# Altium PCB buckboost.PcbDoc
Units mm, origin at the board's own origin, x right, y up, seen from the top; angles counter-clockwise.
Board outline 50.04 x 50.04 mm, 2 copper layers (Top Layer, Bottom Layer); 20 components, 11 nets, 69 pads, 24 vias.
Unrouted connection lines stored in the file: 6.
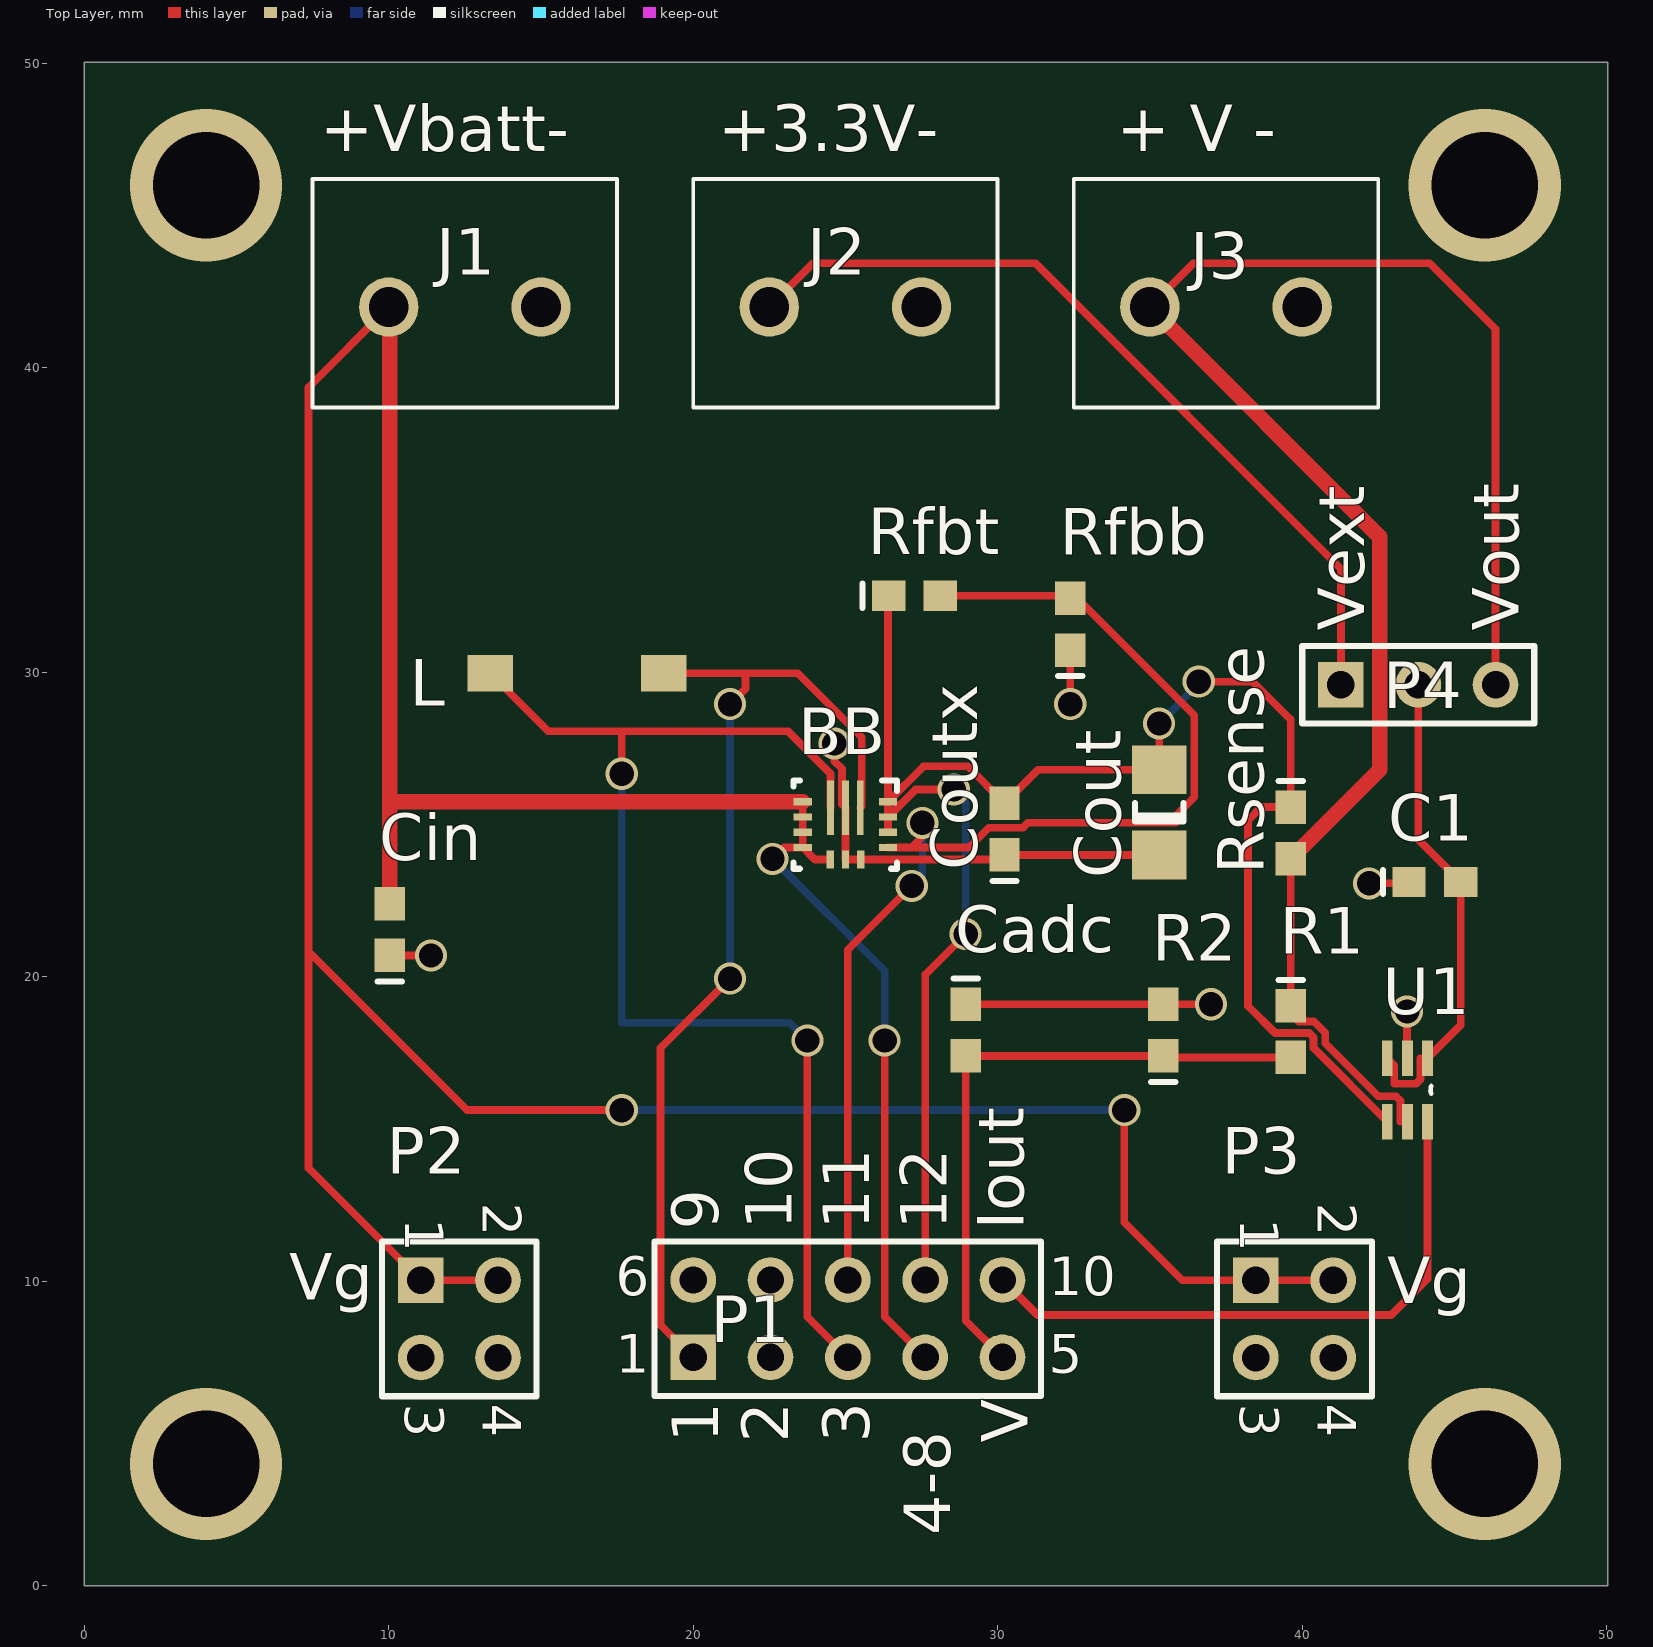
[diagram p0: Top Layer view]
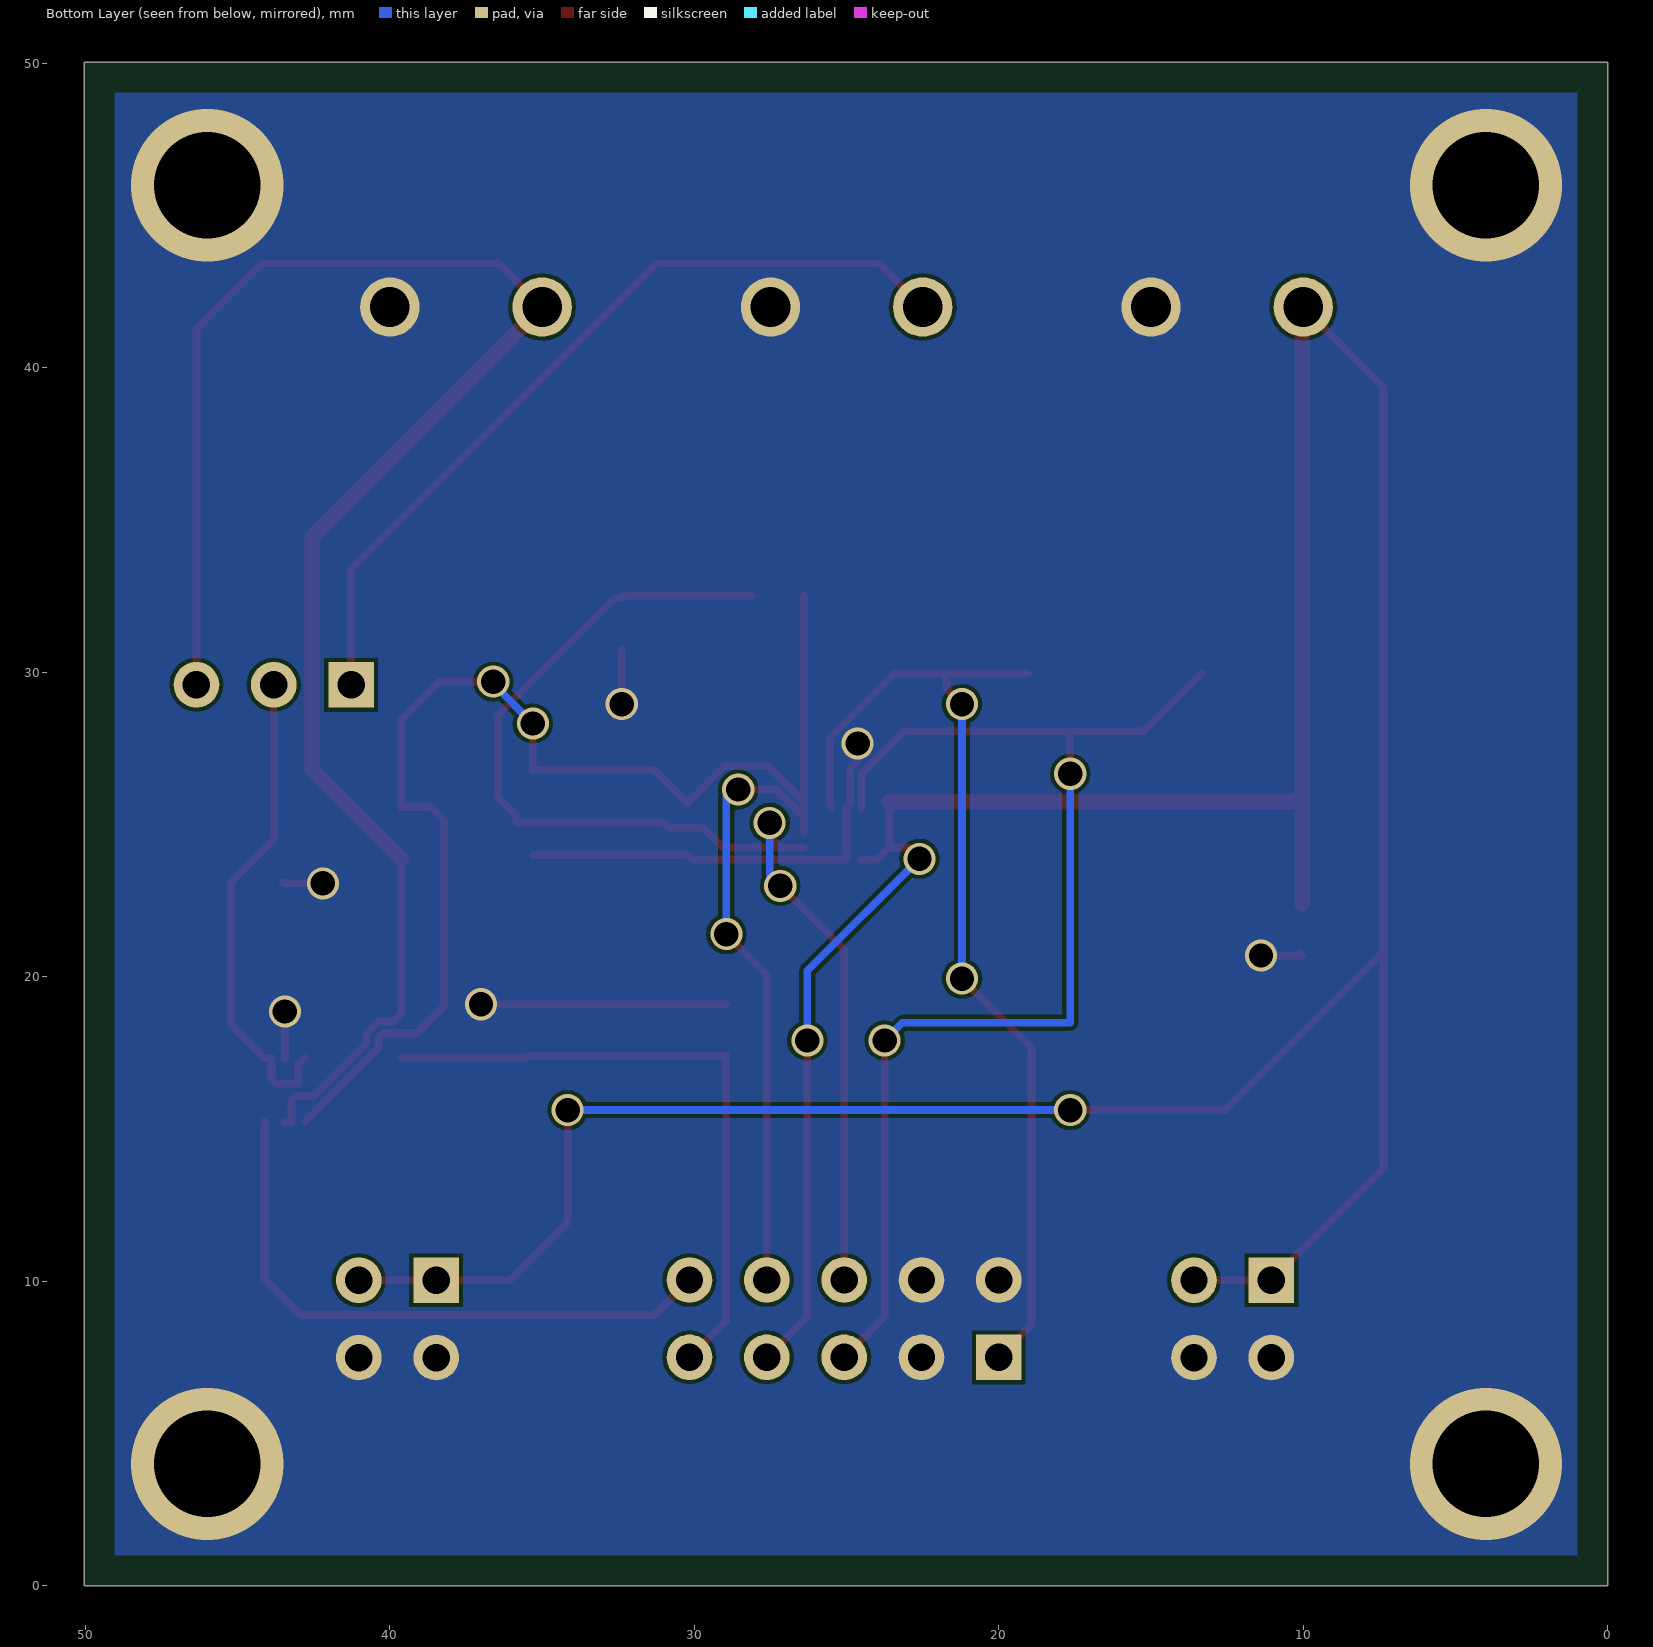
[diagram p1: Bottom Layer view, seen from below]

## Layer stack, top to bottom
Top Solder: solder mask 0.0102, Solder Resist, Dk 3.5
Top Layer: signal copper 0.0356
Dielectric 1: dielectric 0.32, FR-4, Dk 4.8
Bottom Layer: signal copper 0.0356
Bottom Solder: solder mask 0.0102, Solder Resist, Dk 3.5

## Board outline
0,0 50.038,0 50.038,50.038 0,50.038

## Design rules (kind name [scope] priority, off if disabled: settings)
AssemblyTestPointUsage [All] p1 off:
AssemblyTestpoint [All] p1 off: testpointundercomponent=TRUE minsize=1.016 maxsize=2.54 preferedsize=1.524 minholesize=0 maxholesize=1.016 preferedholesize=0.813 testpointgrid=0.025 usegrid=TRUE gridtolerance=0 allowsidetop=TRUE allowsidebottom=TRUE
Clearance [All] p1: gap=0.127 ignorepadtopadclearanceinfootprint=FALSE except(0: Arc-Hole Track-Hole SMDPad-Hole THPad-Hole Via-Hole Fill-Hole Poly-Hole Region-Hole Text-Hole)
FabricationTestPointUsage [All] p1 off: valid=0 allowmultiple=FALSE
FabricationTestpoint [All] p1 off: side=3 testpointundercomponent=FALSE minsize=1.016 maxsize=2.54 preferedsize=1.524 minholesize=0 maxholesize=1.016 preferedholesize=0.813 testpointgrid=0.025 allowsidetop=TRUE allowsidebottom=TRUE usegrid=TRUE gridtolerance=0
HoleSize [All] p1: absolutevalues=TRUE maxlimit=6.35 minlimit=0.203 maxpercent=80.000 minpercent=20.000
MinimumAnnularRing [All] p1: minimumring=0.127
MinimumSolderMaskSliver [All] p1: minsoldermaskwidth=0.102
PlaneConnect [All] p1: planeconnectstyle=Direct reliefexpansion=0.508 reliefentries=4 reliefconductorwidth=0.254 reliefairgap=0.254
PolygonConnect [All] p1: connectstyle=Direct reliefconductorwidth=0.254 reliefentries=4 polygonreliefangle="90 Angle" airgapwidth=0.254
RoutingVias [All] p1: holewidth=0.254 width=0.559 viastyle="Through Hole" minholewidth=0.254 minwidth=0.559 maxholewidth=12.7 maxwidth=12.7
SilkToSilkClearance [All] p1: silktosilkclearance=0
SilkToSolderMaskClearance [IsPad] p1: minsilkscreentomaskgap=0.076 clearancetoexposedcopper=TRUE
SolderMaskExpansion [All] p1: expansion=0.102
Width [All] p1: maxlimit=254 minlimit=0.152 preferedwidth=0.254
21 further rules are at their usual default settings.

## Components (designator, comment, footprint, x,y, rotation, side; value= is the part's Value field where it differs from the comment)
BB "TPS630250" RNC0014A 25,25 r270 top
C1 "Cap Semi" 0603 44.362,23.114 r0 top value=0.1uF
Cadc "Cap" 0603 28.956,18.249 r270 top value=0.1µF
Cin "Cap" 0603 10.033,21.551 r90 top value=10.0µF
Cout "Cap" 1206 35.306,25.403 r90 top value=47.0µF
Coutx "Cap" 0603 30.226,24.853 r90 top value=10.0µF
J1 "691102710002" 691102710002 12.5,42 r0 top
J2 "691102710002" 691102710002 25,42 r0 top
J3 "691102710002" 691102710002 37.5,42 r0 top
L "Inductor" IHLP-1212BZ 16.185,29.972 r0 top value=1.0µH
P1 "Header 5X2A" HDR2X5_CEN 20,7.5 r0 top
P2 "Header 2X2" HDR2X2 11.049,10.033 r270 top
P3 "Header 2X2" HDR2X2 38.481,10.033 r270 top
P4 "Header 3" HDR1X3 41.275,29.591 r0 top
R1 "Res1" 0603 39.624,18.2 r270 top value=100kO
R2 "Res1" 0603 35.433,18.249 r90 top value=100kO
Rfbb "Res1" 0603 32.385,31.584 r90 top value=180kO
Rfbt "Rfbt" 0603 27.266,32.512 r0 top value=562kO
Rsense "Rsense" 0603 39.624,24.726 r270 top value=10mO
U1 "INA214" SOT65P210X110-6N 43.459,16.281 r270 top

## Footprints (in the part's own frame and the unit in brackets; to place one, negate y for a bottom-side part, rotate by r counter-clockwise, add the part's x,y. Pads: shape width x height; smd on the part's side, far side on the other; paste and mask are expansions set on the pad)
0603 [mm] "Chip Capacitor; Body 1.6 x 0.8 mm (LxW typ)"
  rect 1.1x1 smd: 1(-0.85,0) 2(0.85,0)
  silkscreen extent -1.7,-0.4 -1.7,0.4
1206 [mm] "Chip Capacitor; Body 3.2 x 1.6 mm (LxW typ)"
  rect 1.6x1.8 smd: 1(-1.4,0) 2(1.4,0)
  silkscreen extent -0.3,-0.8 0.3,0.8
691102710002 [mm]
  round 1.95 hole 1.3: 1(-2.5,0) 2(2.5,0)
  silkscreen extent -5,-3.3 5,4.2
HDR1X3 [mm] "Connector; Header; 3 Position"
  rect 1.5x1.5 hole 0.9: 1(0,0)
  round 1.5 hole 0.9: 2(2.54,0) 3(5.08,0)
  silkscreen extent -1.27,-1.27 6.35,1.27
HDR2X2 [mm] "Connector; Header; 2x2 Position"
  rect 1.5x1.5 hole 0.9: 1(0,0)
  round 1.5 hole 0.9: 2(0,2.54) 3(2.54,0) 4(2.54,2.54)
  silkscreen extent -1.27,-1.27 3.81,3.81
HDR2X5_CEN [mm] "Connector; Header; 5x2 Position"
  rect 1.5x1.5 hole 0.9: 1(0,0)
  round 1.5 hole 0.9: 2(2.54,0) 3(5.08,0) 4(7.62,0) 5(10.16,0) 6(0,2.54) 7(2.54,2.54) 8(5.08,2.54) 9(7.62,2.54) 10(10.16,2.54)
  silkscreen extent -1.27,-1.27 11.43,3.81
IHLP-1212BZ [mm]
  rect 1.5x1.2 smd: 1(-2.85,0) 2(2.85,0)
RNC0014A [mm]
  rect 1.79x0.22 smd paste-0.882 mask+0.051: 1(-0.555,0.49) 2(-0.555,0) 3(-0.555,-0.49)
  rect 0.24x0.6 smd paste+0 mask+0.051: 4(-0.75,-1.4) 5(-0.25,-1.4) 6(0.25,-1.4) 7(0.75,-1.4) 11(0.75,1.4) 12(0.25,1.4) 13(-0.25,1.4) 14(-0.75,1.4)
  rect 0.6x0.24 smd paste+0 mask+0.051: 8(1.15,-0.5) 9(1.15,0) 10(1.15,0.5)
  silkscreen extent -1.45,-1.7 1.45,1.7, body extent 0,0 0.25,0.25, height 0.25
SOT65P210X110-6N [mil]
  rect 46x14 smd: 1(-41,26) 2(-41,0) 3(-41,-26) 4(41,-26) 5(41,0) 6(41,26)
  silkscreen extent -5,30 5,31

## Part data
BB: "Buck-boost converter", Supplier Part Number 1=296-42036-6-ND, Supplier 1=Digi-Key
C1: "Capacitor (Semiconductor SIM Model)", LatestRevisionDate=29-May-2009, LatestRevisionNote="IPC-7351 Footprint Added.", PackageDescription="Chip Capacitor", PackageReference=C1206, Published=8-Jun-2000, Publisher="Altium Limited"
Cadc Cin Cout Coutx: "Capacitor", LatestRevisionDate=17-Jul-2002, LatestRevisionNote="Re-released for DXP Platform.", PackageDescription="Radial Cap, Thru-Hole; 2 Leads; 0.3 in Pin Spacing", PackageReference=RAD-0.3, Published=8-Jun-2000, Publisher="Altium Limited"
J1 J2 J3: "102 Series 5mm Pitch Straight, PCB Terminal Block, Through Hole, 2 Way", Package=None, Availability=Unavailable, MF="Wurth Electronics", MP=691102710002, Price=None, SnapEDA_Link=https://www.snapeda.com/parts/691102710002/Wurth%20Electronics%20Inc/view-part/?ref=snap
P1: "Header, 5-Pin, Dual row", LatestRevisionDate=17-Jul-2002, LatestRevisionNote="Re-released for DXP Platform.", Publisher="Altium Limited"
P2 P3: "Header, 2-Pin, Dual row", LatestRevisionDate=17-Jul-2002, LatestRevisionNote="Re-released for DXP Platform.", Publisher="Altium Limited"
P4: "Header, 3-Pin", LatestRevisionDate=17-Jul-2002, LatestRevisionNote="Re-released for DXP Platform.", Publisher="Altium Limited"
R1 R2 Rfbb: "Resistor", LatestRevisionDate=17-Jul-2002, LatestRevisionNote="Re-released for DXP Platform.", PackageDescription="Axial Device, Thru-Hole; 2 Leads; 0.3 in Pin Spacing", PackageReference=AXIAL-0.3, Published=8-Jun-2000, Publisher="Altium Limited"
Rfbt Rsense: library part Res1, "Resistor", LatestRevisionDate=17-Jul-2002, LatestRevisionNote="Re-released for DXP Platform.", PackageDescription="Axial Device, Thru-Hole; 2 Leads; 0.3 in Pin Spacing", PackageReference=AXIAL-0.3, Published=8-Jun-2000, Publisher="Altium Limited"
U1: "Current monitor", Supplier Part Number 1=296-38956-6-ND, Supplier 1=Digi-Key
L: Code_IEC=1005, Code_JEITA=0402, LatestRevisionDate=29-May-2009, LatestRevisionNote="IPC-7351 Footprint Added.", PackageDescription="Chip Inductor", PackageReference=0402-A, Published=8-Jun-2000, Publisher="Altium Limited"

## Via types
v1: diameter 1.054, hole 0.8, Top Layer to Bottom Layer, 20 vias
v2: diameter 5/5 (per signal layer), hole 3.5, Top Layer to Bottom Layer, 4 vias

## Nets (pads, with @x,y where several pads share a name; then routed paths per layer and width w, separated by ;. In a path a pad name is that pad's centre, name@x,y a point inside that pad or via, vN(x,y) a via of type N, cw(c..) or ccw(c..) an arc to the next point about the centre after c; other vN are vias at no path point)
+V: J3.1 P4.3 R1.1 Rsense.2 U1.5 | length 58
  Top Layer w0.254: J3.1 36.434,43.434 44.196,43.434 46.355,41.275 P4.3 ; Rsense.2 R1.1 39.624,18.796 39.885,18.535 40.387,18.535 40.759,18.163 40.759,17.819 42.5,16.078 43.082,16.078 43.231,15.929 43.231,15.24 U1.5
  Top Layer w0.508: J3.1 42.545,34.455 42.545,26.797 Rsense.2
D1: BB.1 L.2 P1.1 | length 33.8
  Top Layer w0.254: L.2 21.717,29.972 ; P1.1 18.923,8.577 18.923,17.653 v1(21.209,19.939) ; v1(21.209,28.956) 21.717,29.464 21.717,29.972 ; BB.1 25.533,25.598 25.533,27.87 23.431,29.972 21.717,29.972
  Bottom Layer w0.254: v1(21.209,19.939) v1(21.209,28.956)
D2: BB.2 BB.9 BB.10 C1.1 Cadc.1 Cin.1 Cout.1 Coutx.1 J1.2 J2.2 J3.2 P1.2 P1.6 P1.7 P2.3 P2.4 P3.3 P3.4 R2.2 Rfbb.1 U1.2 | length 28.5
  Top Layer w0.254: Cin.1@10.122,20.79 Cin.1 v1(11.386,20.701) ; v1(24.638,27.661) 24.638,27.082 24.891,26.829 24.891,25.664 BB.2 BB.9 BB.10 30.073,23.85 Coutx.1 Cout.1 ; Cadc.1 R2.2 v1(37.006,19.099) ; v1(32.385,28.956) Rfbb.1 ; v1(42.204,23.07) 43.468,23.07 C1.1 ; v1(43.449,18.861) 43.449,17.333 U1.2
  other v2: 4,4 46,4 4,46 46,46
D3: BB.3 L.1 P1.3 | length 40.5
  Top Layer w0.254: L.1 15.24,28.067 17.653,28.067 ; v1(17.653,26.67) 17.653,28.067 ; v1(23.749,17.907) 23.749,8.831 P1.3 ; BB.3 24.51,26.671 23.114,28.067 17.653,28.067
  Bottom Layer w0.254: v1(17.653,26.67) 17.653,18.489 23.167,18.489 v1(23.749,17.907)
D4: BB.4 BB.5 BB.6 BB.7 BB.8 Cin.2 J1.1 P1.4 P2.1 P2.2 P3.1 P3.2 | length 132.8
  Top Layer w0.254: J1.1@10.033,41.967 J1.1 7.366,39.366 7.366,20.828 ; P2.2 P2.1 7.366,13.716 7.366,20.828 ; v1(17.653,15.621) 12.573,15.621 7.366,20.828 ; v1(22.606,23.876) 22.98,24.25 BB.7 ; BB.4 BB.5 BB.6 BB.7 ; BB.8 24,23.85 BB.7 ; v1(26.289,17.907) 26.289,8.831 P1.4 ; v1(34.163,15.621) 34.163,11.938 36.068,10.033 P3.1 P3.2
  Top Layer w0.508: Cin.2 10.033,25.908 ; J1.1@10.033,41.967 10.033,25.908 ; BB.4 10.191,25.75 10.033,25.908
  Bottom Layer w0.254: v1(17.653,15.621) v1(34.163,15.621) ; v1(22.606,23.876) 26.289,20.193 v1(26.289,17.907)
D7: BB.11 P1.8 Rfbb.2 Rfbt.2 | length 40.5
  Top Layer w0.254: P1.8 25.08,20.889 v1(27.178,22.987) ; BB.11 27.178,24.25 ; v1(27.526,25.056) 27.526,24.598 27.178,24.25 ; Rfbt.2 32.307,32.512 Rfbb.2 32.615,32.434 36.46,28.589 36.46,25.898 35.852,25.29 35.852,25.057 30.989,25.057 30.831,24.899 29.713,24.899 29.064,24.25 27.178,24.25
  Bottom Layer w0.254: v1(27.178,22.987) 27.526,23.335 v1(27.526,25.056)
D8: BB.12 BB.13 BB.14 Cout.2 Coutx.2 P1.9 Rfbt.1 Rsense.1 U1.4 | length 61.4
  Top Layer w0.254: BB.12 BB.13 ; Rfbt.1 26.4,32.496 BB.14 ; P1.9 27.62,20.072 v1(28.948,21.4) ; v1(28.559,26.154) 27.304,26.154 BB.13 ; v1(35.306,28.321) Cout.2 31.326,26.803 Coutx.2 29.012,26.917 27.567,26.917 BB.14 ; v1(36.605,29.693) 38.379,29.693 39.624,28.448 Rsense.1 38.657,25.576 38.227,25.146 38.227,19.038 39.111,18.154 40.229,18.154 40.378,18.005 40.378,17.661 U1.4 ; BB.13 BB.14
  Bottom Layer w0.254: v1(28.559,26.154) 28.742,26.154 28.948,25.948 v1(28.948,21.4) ; v1(35.306,28.321) 36.605,29.62 v1(36.605,29.693)
Iout: P1.10 U1.6 | length 20.1
  Top Layer w0.254: P1.10 31.31,8.89 42.926,8.89 44.12,10.084 U1.6
NetC1_2: C1.2 P4.2 U1.1 U1.3 | length 16.1
  Top Layer w0.254: U1.3 43.028,17.094 43.028,16.485 43.742,16.485 43.891,16.633 43.891,17.323 U1.1 45.212,18.415 C1.2 43.815,24.511 P4.2
NetJ2_1: J2.1 P4.1 | length 27.3
  Top Layer w0.254: J2.1 23.934,43.434 31.242,43.434 41.275,33.401 P4.1
Vout: Cadc.2 P1.5 R1.2 R2.1 | length 21.1
  Top Layer w0.254: P1.5 28.956,8.704 Cadc.2 R2.1 35.482,17.35 R1.2

## Polygon pours and split planes (outlines as drawn)
D2 on Bottom Layer "GND" (solid, pour order 0): 1,49.037 1,1 49.037,1 49.037,49.037

## Silkscreen, mask and mechanical layers (free items; w line width, h text height)
Top Overlay:
  text "+Vbatt-" at 7.747,47.117 h1.52
  text "+3.3V-" at 20.828,47.117 h1.52
  text "+ V -" at 33.909,47.117 h1.52
  text "Vext" at 42.037,31.369 h1.52 r90
  text "Vout" at 47.117,31.369 h1.52 r90
  text "9" at 20.828,11.684 h1.52 r90
  text "10" at 23.241,11.684 h1.52 r90
  text "11" at 25.781,11.684 h1.52 r90
  text "12" at 28.321,11.684 h1.52 r90
  text "Iout" at 30.861,11.684 h1.52 r90
  text "Vg" at 6.731,9.398 h1.52
  text "Vg" at 42.799,9.271 h1.52
  text "1" at 20.828,4.699 h1.52 r90
  text "2" at 23.114,4.699 h1.52 r90
  text "3" at 25.781,4.699 h1.52 r90
  text "V" at 30.988,4.699 h1.52 r90
  text "4-8" at 28.448,1.651 h1.52 r90

## Text inside footprints (layer, text, board x,y; h text height)
J1: Mechanical 1 "1" at 8.844,39.346 h1.88
J2: Mechanical 1 "1" at 21.344,39.346 h1.88
J3: Mechanical 1 "1" at 33.844,39.346 h1.88
P1: Top Overlay "1" at 17.46,6.992 h1.27; Top Overlay "5" at 31.684,6.992 h1.27; Top Overlay "10" at 31.684,9.532 h1.27; Top Overlay "6" at 17.46,9.532 h1.27
P2: Top Overlay "1" at 10.541,12.065 h1.27 r270; Top Overlay "2" at 13.081,12.573 h1.27 r270; Top Overlay "4" at 13.081,5.969 h1.27 r270; Top Overlay "3" at 10.541,5.969 h1.27 r270
P3: Top Overlay "1" at 37.973,12.065 h1.27 r270; Top Overlay "2" at 40.513,12.573 h1.27 r270; Top Overlay "4" at 40.513,5.969 h1.27 r270; Top Overlay "3" at 37.973,5.969 h1.27 r270